# Altium PCB EasyGate1541-II.PcbDoc
Units mm, origin at the board's own origin, x right, y up, seen from the top; angles counter-clockwise.
Board outline 18.29 x 51.31 mm, 2 copper layers (Top Layer, Bottom Layer), stack 0.969 mm thick; 21 components, 55 nets, 147 pads, 63 vias.
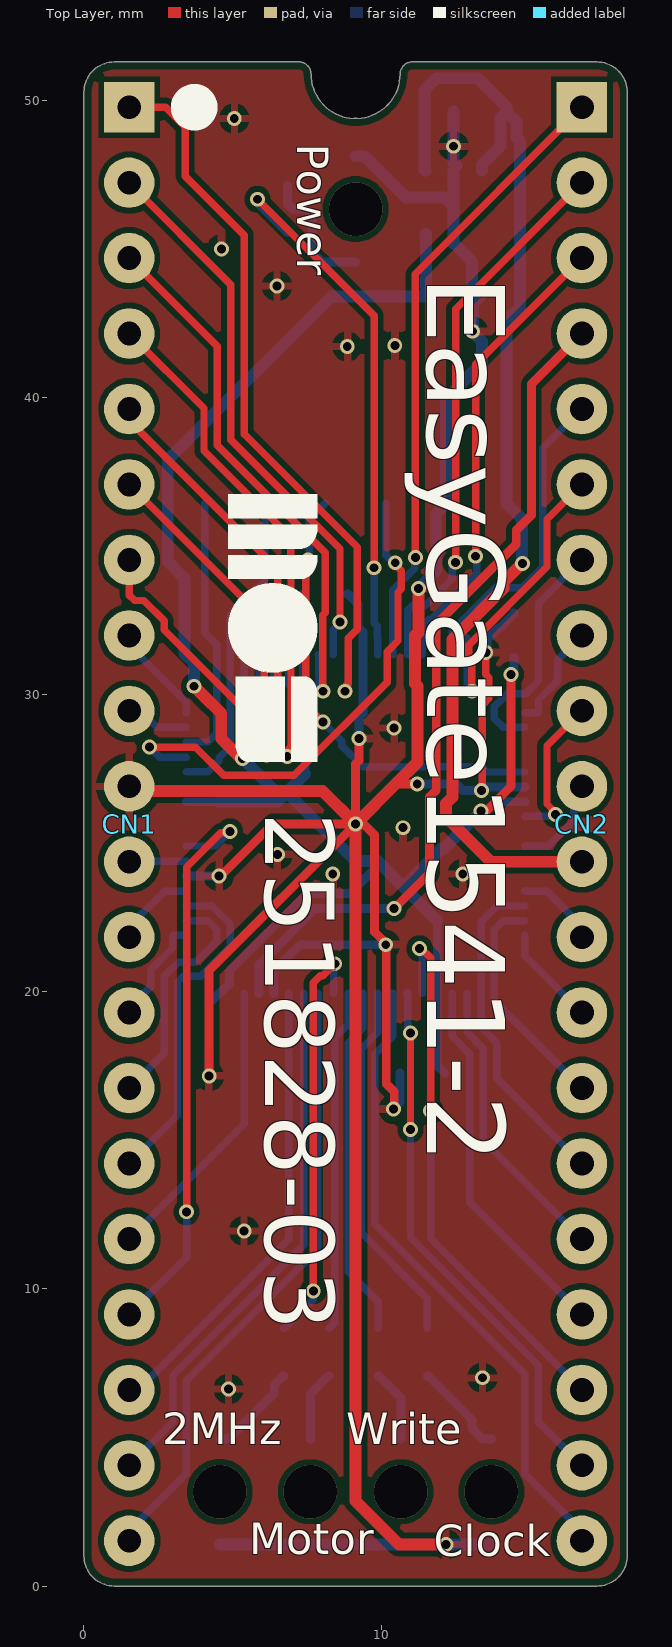
[diagram p0: Top Layer view]
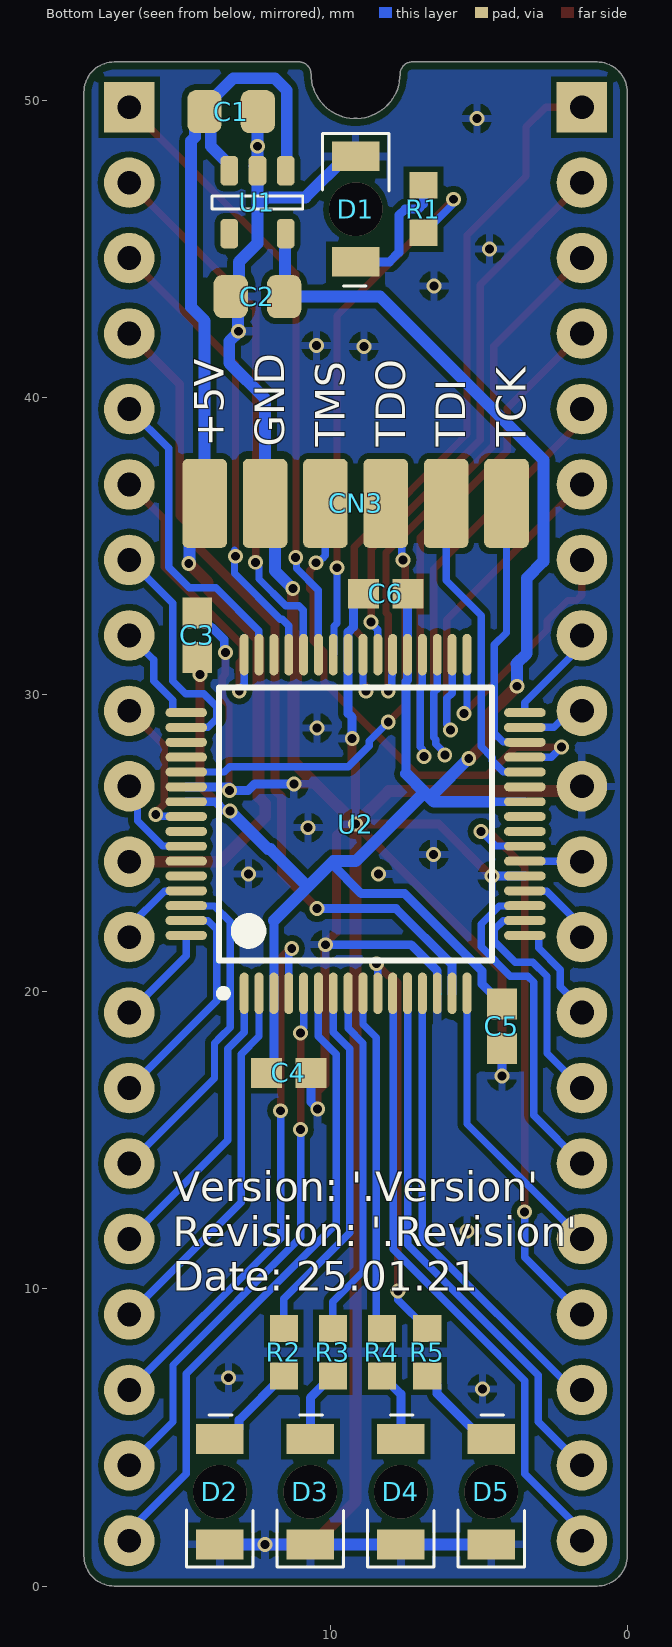
[diagram p1: Bottom Layer view, seen from below]

## Layer stack, top to bottom
Top Solder: solder mask 0.0254, SM-001, Dk 4
Top Layer: signal copper 0.035
Dielectric 1: core 0.8986, Core-043, Dk 4.3
Bottom Layer: signal copper 0.035
Bottom Solder: solder mask 0.0254, SM-001, Dk 4

## Board outline
0,1.016 ccw(c1.016,1.016) 1.016,0 17.272,0 ccw(c17.272,1.016) 18.288,1.016 18.288,50.292 ccw(c17.272,50.292) 17.272,51.308 11.049,51.308 ccw(c11.049,50.903) 10.644,50.903 cw(c9.144,50.903) 7.644,50.903 ccw(c7.239,50.903) 7.239,51.308 1.016,51.308 ccw(c1.016,50.292) 0,50.292

## Design rules (kind name [scope] priority, off if disabled: settings)
BoardOutlineClearance [All] p1: gap=0.254 ignorepadtopadclearanceinfootprint=FALSE
Clearance [All] p1: gap=0.2 ignorepadtopadclearanceinfootprint=TRUE
ComponentClearance ComponentClearance_Sheet [HasFootprint('PCB Title Block DIN A4')] p1: gap=0 collisioncheckmode=3 verticalgap=0 showdistances=FALSE
ComponentClearance [All] p2: gap=0 collisioncheckmode=3 verticalgap=0 showdistances=FALSE
MinimumSolderMaskSliver [All] p1: minsoldermaskwidth=0.103
PolygonConnect [All] p1: connectstyle=Relief reliefconductorwidth=0.254 reliefentries=4 polygonreliefangle="90 Angle" airgapwidth=0.254
RoutingVias [All] p1: holewidth=0.4 width=0.7 viastyle="Through Hole" minholewidth=0.3 minwidth=0.5 maxholewidth=0.5 maxwidth=0.8
SilkToSilkClearance [All] p1: silktosilkclearance=0
SilkToSolderMaskClearance [IsPad] p1: minsilkscreentomaskgap=0.2 clearancetoexposedcopper=TRUE
SolderMaskExpansion [All] p1: expansion=0.038 istentingtop=FALSE
UnRoutedNet [All] p1: checkbadconnections=TRUE
Width [All] p1: maxlimit=0.4 minlimit=0.25 preferedwidth=0.3
25 further rules are at their usual default settings.

## Components (designator, comment, footprint, x,y, rotation, side; value= is the part's Value field where it differs from the comment)
C1 "10µF" "Kemet C0805CxxxK8RACTU Series H=1.4mm" 13.335,49.634 r0 bottom
C2 "10µF" "Kemet C0805CxxxK8RACTU Series H=1.4mm" 12.446,43.411 r180 bottom
C3 "100nF" "CAP 100nF SMD 0603 C0603C104J3RACTU" 14.478,32.004 r270 bottom
C4 "100nF" "CAP 100nF SMD 0603 C0603C104J3RACTU" 11.394,17.272 r0 bottom
C5 "100nF" "CAP 100nF SMD 0603 C0603C104J3RACTU" 4.216,18.847 r90 bottom
C6 "100nF" "CAP 100nF SMD 0603 C0603C104J3RACTU" 8.128,33.401 r180 bottom
CN1 "Pin Header Left Side" "Pin Header 01x20 2.54mm precision Horizontal Male" 1.524,49.784 r270 top locked
CN2 "Pin Header Right Side" "Pin Header 01x20 2.54mm precision Horizontal Male" 16.764,49.784 r270 top locked
CN3 "JTAG" "SMD PAD CONN 01x06 small" 9.144,36.449 r0 bottom locked
D1 "Power" "LED green Gullwing Everlight 25-21/GHC-YSU/2A" 9.144,46.355 r270 top
D2 "Clock" "LED blue Gullwing Everlight 25-21/BHC-XR2S1/2A" 13.716,3.175 r90 top
D3 "Motor" "LED white Gullwing Everlight 25-21/T1D-ANQHY/2A" 10.668,3.175 r90 top
D4 "Writing" "LED red Gullwing Everlight 25-21SURC/S530-A4/TR8" 7.62,3.175 r90 top
D5 "2MHz" "LED white Gullwing Everlight 25-21/T1D-ANQHY/2A" 4.572,3.175 r90 top
R1 "1k" "1k Ohm R 0603 SMD" 6.858,46.355 r90 bottom
R2 "1k" "1k Ohm R 0603 SMD" 11.557,7.874 r270 bottom
R3 "1k" "1k Ohm R 0603 SMD" 9.906,7.874 r270 bottom
R4 "1k" "1k Ohm R 0603 SMD" 8.255,7.874 r270 bottom
R5 "1k" "1k Ohm R 0603 SMD" 6.731,7.874 r270 bottom
U1 "SPX5205M5-L-3-3/TR" SOT-23-5 12.446,46.586 r0 bottom
U2 "XC9572XL-10VQG64C" XC9572XL-10VQG64 9.144,25.654 r90 bottom locked

## Footprints (in the part's own frame and the unit in brackets; to place one, negate y for a bottom-side part, rotate by r counter-clockwise, add the part's x,y. Pads: shape width x height; smd on the part's side, far side on the other; paste and mask are expansions set on the pad)
"1k Ohm R 0603 SMD" [mm] "Chip Resistor 2-Leads, Body 1,60x0,80mm, IPC Medium Density"
  rect 0.9x0.95 smd: 1(-0.8,0) 2(0.8,0)
  body extent -0.8,-0.4 0.8,0.4, height 0.45
"CAP 100nF SMD 0603 C0603C104J3RACTU" [mm] "Chip Capacitor, 2-Leads, Body 1,60x0,80mm, IPC Medium Density"
  rect 1.05x1 smd: 1(-0.75,0) 2(0.75,0)
  body extent -0.8,-0.4 0.8,0.4, height 0.87
"Kemet C0805CxxxK8RACTU Series H=1.4mm" [mm]
  rrect50% 1.15x1.45 smd: 1(-0.9,0) 2(0.9,0)
  body extent -1,-0.63 1,0.63, height 1.4
"LED blue Gullwing Everlight 25-21/BHC-XR2S1/2A" [mm]
  rect 1x1.6 smd far side: 1(-1.778,0) 2(1.778,0)
  body extent -1.6,-0.8 1.6,0.8, height 0.3
"LED green Gullwing Everlight 25-21/GHC-YSU/2A" [mm]
  rect 1x1.6 smd far side: 1(-1.778,0) 2(1.778,0)
  body extent -1.6,-0.8 1.6,0.8, height 0.3
"LED red Gullwing Everlight 25-21SURC/S530-A4/TR8" [mm]
  rect 1x1.6 smd far side: 1(-1.778,0) 2(1.778,0)
  body extent -1.6,-0.8 1.6,0.8, height 0.3
"LED white Gullwing Everlight 25-21/T1D-ANQHY/2A" [mm]
  rect 1x1.6 smd far side: 1(-1.778,0) 2(1.778,0)
  body extent -1.6,-0.8 1.6,0.8, height 0.3
"Pin Header 01x20 2.54mm precision Horizontal Male" [mm] "Precision"
  rect 1.7x1.7 hole 0.8: 1(0,0)
  round 1.7 hole 0.8: 2(2.54,0) 3(5.08,0) 4(7.62,0) 5(10.16,0) 6(12.7,0) 7(15.24,0) 8(17.78,0) 9(20.32,0) 10(22.86,0) 11(25.4,0) 12(27.94,0) 13(30.48,0) 14(33.02,0) 15(35.56,0) 16(38.1,0) 17(40.64,0) 18(43.18,0) 19(45.72,0) 20(48.26,0)
  body extent -1.27,-1.27 49.53,1.27, height 1.8
"SMD PAD CONN 01x06 small" [mm]
  rrect25% 1.5x3 smd paste-2: 1(-5.08,0) 2(-3.048,0) 3(-1.016,0) 4(1.016,0) 5(3.048,0) 6(5.08,0)
SOT-23-5 [mm]
  rrect50% 0.6x1 smd: 1(-0.95,-1.06) 2(0,-1.06) 3(0.95,-1.06) 4(0.95,1.06) 5(-0.95,1.06)
  silkscreen extent -1.52,-0.2 1.52,0.23, body extent -1.45,-1.41 1.45,1.41, height 1.3
XC9572XL-10VQG64 [mm] "TSQFP, 64-Leads, Body 10,00x10,00mm, Pitch 0,50mm, IPC Medium Density"
  oval 1.4x0.3 smd: 1(-5.7,3.75) 2(-5.7,3.25) 3(-5.7,2.75) 4(-5.7,2.25) 5(-5.7,1.75) 6(-5.7,1.25) 7(-5.7,0.75) 8(-5.7,0.25) 9(-5.7,-0.25) 10(-5.7,-0.75) 11(-5.7,-1.25) 12(-5.7,-1.75) 13(-5.7,-2.25) 14(-5.7,-2.75) 15(-5.7,-3.25) 16(-5.7,-3.75) 33(5.7,-3.75) 34(5.7,-3.25) 35(5.7,-2.75) 36(5.7,-2.25) 37(5.7,-1.75) 38(5.7,-1.25) 39(5.7,-0.75) 40(5.7,-0.25) 41(5.7,0.25) 42(5.7,0.75) 43(5.7,1.25) 44(5.7,1.75) 45(5.7,2.25) 46(5.7,2.75) 47(5.7,3.25) 48(5.7,3.75)
  oval 0.3x1.4 smd: 17(-3.75,-5.7) 18(-3.25,-5.7) 19(-2.75,-5.7) 20(-2.25,-5.7) 21(-1.75,-5.7) 22(-1.25,-5.7) 23(-0.75,-5.7) 24(-0.25,-5.7) 25(0.25,-5.7) 26(0.75,-5.7) 27(1.25,-5.7) 28(1.75,-5.7) 29(2.25,-5.7) 30(2.75,-5.7) 31(3.25,-5.7) 32(3.75,-5.7) 49(3.75,5.7) 50(3.25,5.7) 51(2.75,5.7) 52(2.25,5.7) 53(1.75,5.7) 54(1.25,5.7) 55(0.75,5.7) 56(0.25,5.7) 57(-0.25,5.7) 58(-0.75,5.7) 59(-1.25,5.7) 60(-1.75,5.7) 61(-2.25,5.7) 62(-2.75,5.7) 63(-3.25,5.7) 64(-3.75,5.7)
  silkscreen extent -5.82,-4.6 4.6,4.6, body extent -6.01,-6.01 6.01,6.01, height 1.1

## Part data
C1 C2: library part CMP-Capacitors-Ceramic_Capacitors-00016-2, "KEMET - C0805C106K8RACTU - CAP, 10µF, 10V, 10%, X7R, 0805", Capacitance=10uF, Case Code (Imperial)=0805, Case Code (Metric)=2012, Dielectric=X7R, Dielectric Material=Ceramic, Max Operating Temperature=125°C, Min Operating Temperature=-55°C, Package Quantity=1, Tolerance=10%, Voltage=10V, Case/Package=0805, Depth=1.25mm, Dissipation Factor=7.5%, Height=1.25mm, Length=2mm, Mount="Surface Mount,PCB", Packaging="Tape and Reel", REACH SVHC="No SVHC", Termination=SMD/SMT, Thickness=0.055inch, Voltage Rating=10V, Voltage Rating (DC)=10V, Width=1.2mm
C3 C4 C5 C6: library part CMP-Capacitors-Ceramic_Capacitors-00012-1, "KEMET         C0603C104J3RACTU             SMD Multilayer Ceramic Capacitor, 0603 [1608 Metric], 0.1 F, 25 V,  5%, X7R, C Series", Case Code (Imperial)=0603, Case Code (Metric)=1608, Dielectric=X7R, Dielectric Material=Ceramic, Max Operating Temperature=125°C, Min Operating Temperature=-55°C, Package Quantity=4000, Tolerance=5%, Voltage=25V, Capacitance=100nF, Case/Package=0603, Contact Plating=Tin,Matte, Depth=0.8mm, Height=0.8mm, Lead Pitch=0.7mm, Length=1.6mm, Mount="Surface Mount,PCB", Number of Pins=2, Packaging="Tape and Reel", Radiation Hardening=No, REACH SVHC="No SVHC", Termination=SMD/SMT, Thickness=0.034inch, Voltage Rating=25V, Voltage Rating (DC)=25V, Width=0.031inch
CN1 CN2: library part CMP-Connectors-Male_PIN_Headers-00031-2, "Conn Header Vert 20POS 2MM", Color=Black, Package Quantity=250, Connector Type="Male Pin", Contact Mating Length=0.141inch, Contact Plating=Gold, Mount="Through Hole", Number of Positions=20, Number of Rows=1, Packaging=Bulk, Pitch=0.079inch, Termination=Solder
CN3: library part CMP-Connectors-00022-1, "SMD Pad Connector 01x06"
D1: library part CMP-LEDs-00010-1, "LED Uni-Color Green 518nm 2-Pin Chip LED T/R", Color=Green, Forward Current=20mA, Forward Voltage=3.5V, Dominant Wavelength=525nm, Lens Style=Diffused,Colorless,Circular, Mount="Surface Mount", Number of LEDs=1, Number of Pins=2, Packaging="Tape and Reel", Radiation Hardening=No, Viewing Angle=60°
D2: library part CMP-LEDs-00012-1, "LED Uni-Color Blue 468nm Chip LED 2-Pin SMD T/R", Forward Current=20mA
D3 D5: library part CMP-LEDs-00011-1, "Standard LEDs - SMD SMD LED", Case/Package=SMD/SMT, Color=White, Forward Current=25mA, Forward Voltage=2.92V, Lens Color=Yellow, Max Operating Temperature=85°C, Min Operating Temperature=-40°C, Package Quantity=2000, Power Dissipation=95mW, Reverse Voltage=5V, Test Current=5mA, Depth=1.6mm, Height=1.1mm, Length=3.2mm, Lens Style=Diffused,Colored,Circular, Lens Transparency=Diffused, Luminous Intensity=70mcd, Mount="Surface Mount", Number of Elements=1, Number of LEDs=1, Number of Pins=2, Packaging="Tape and Reel", Radiation Hardening=No, Viewing Angle=130°, Width=1.6mm
D4: library part CMP-LEDs-00009-3, "SMD LED red 2.7. . .3.15 V Bottom View, 25-21SURC/S530-A4/TR8, Everlight Electronics", Forward Current=20mA
R1 R2 R3 R4 R5: library part CMP-Resistors-Yageo_SMD_060300002-1, "RES SMD 1K OHM 1% 1/10W 0603", Case Code (Imperial)=0603, Case Code (Metric)=1608, Max Operating Temperature=155°C, Min Operating Temperature=-55°C, Power Rating=100mW, Resistance=1kR, Temperature Coefficient=100ppm/°C, Tolerance=1%, Voltage Rating=50V, Case/Package=0603, Composition="Thick Film", Contact Plating=Tin,Matte, Depth=0.8mm, Height=0.45mm, Lead Free="Lead Free", Length=1.6mm, Military Standard=Not, Packaging="Tape and Reel", Radiation Hardening=No, REACH SVHC="No SVHC", Termination=SMD/SMT
U1: library part CMP-ICs-Power_Supply-00002-2, "LDO Regulator Pos 3.3V 0.15A 5-Pin SOT-23 T/R", Case/Package=SOT-23, Dropout Voltage=210mV, Max Input Voltage=16V, Max Operating Temperature=125°C, Max Output Current=150mA, Min Input Voltage=2.5V, Min Operating Temperature=-40°C, Min Output Voltage=3.3V, Quiescent Current=1uA, Accuracy=1%, Height=1.15mm, Lead Free="Lead Free", Length=2.9mm, Mount="Surface Mount", Number of Outputs=1, Number of Pins=5, Number of Regulators=1, Output Current=150mA, Output Type=Fixed, Output Voltage=3.3V, Packaging="Tape and Reel", Polarity=Positive, Radiation Hardening=No, Width=1.6mm
U2: library part CMP-ICs-CPLD_FPGA-00004-1, "IC CPLD 72MC 10NS 64VQFP", Case/Package=TQFP, Max Frequency=100MHz, Max Operating Temperature=70°C, Max Supply Voltage=3.6V, Min Operating Temperature=0°C, Min Supply Voltage=3V, Operating Supply Voltage=3.3V, Package Quantity=160, Contact Plating=Tin,Matte, Lead Free="Lead Free", Memory Type=FLASH, Mount="Surface Mount", Number of Gates=1600, Number of I/Os=52, Number of Logic Blocks (LABs)=4, Number of Logic Elements/Cells=4, Number of Macrocells=72, Number of Pins=64, Packaging=Tray, Propagation Delay=10ns, Radiation Hardening=No, Speed Grade=10, Turn-On Delay Time=10ns

## Via types
v1: diameter 0.5, hole 0.3, Top Layer to Bottom Layer, tented both sides, 58 vias
v2: diameter 1.8, hole 1.8, Top Layer to Bottom Layer, 5 vias

## Nets (pads, with @x,y where several pads share a name; then routed paths per layer and width w, separated by ;. In a path a pad name is that pad's centre, name@x,y a point inside that pad or via, vN(x,y) a via of type N, cw(c..) or ccw(c..) an arc to the next point about the centre after c; other vN are vias at no path point)
2MHz: R5.1 U2.10 | length 14.1
  Top Layer w0.25: v1(7.722,9.931) 7.722,20.308 7.961,20.548 8.043,20.548 v1(8.445,20.949)
  Bottom Layer w0.25: R5.1 6.756,8.674 7.722,9.64 v1(7.722,9.931) ; U2.10 8.404,19.964 8.404,20.908 v1(8.445,20.949)
+3V3: C2.2 C3.2 C4.2 C5.2 C6.2 U1.5 U2.3 U2.26 U2.37 U2.55 | length 67.8
  Top Layer w0.3: v1(13.367,26.086) 13.406,26.124 13.576,26.124 14.376,26.924 v1(14.376,30.683)
  Top Layer w0.4: v1(3.709,30.291) 4.021,29.98 4.624,29.377 4.624,28.524 5.265,27.883 5.315,27.883 v1(5.334,27.864)
  Bottom Layer w0.3: U2.26 4.547,26.404 ; C5.2 4.216,19.622 4.566,19.972 4.591,19.972 4.894,20.274 4.894,20.711 7.492,23.309 8.952,23.309 9.97,24.328 ; C6.2 7.394,33.385 U2.37 7.394,30.505 7.444,30.455 7.444,27.344 ; 11.894,22.404 U2.3 11.894,17.522 C4.2 ; v1(13.367,26.086) 13.406,26.124 13.576,26.124 13.856,26.404 U2.55 ; v1(14.376,30.683) 14.478,30.785 C3.2
  Bottom Layer w0.4: v1(3.709,30.291) 3.709,31.022 3.73,31.043 3.382,31.391 3.382,33.931 2.819,34.493 2.819,37.91 8.32,43.411 C2.2 11.521,43.436 11.521,45.501 U1.5 ; 4.547,26.404 6.504,26.404 ; v1(5.334,27.864) 6.504,26.694 6.504,26.404 ; 7.444,27.344 6.824,26.724 ; 11.894,22.404 10.752,23.546 ; v1(13.367,26.086) 12.087,24.806 12.013,24.806 10.752,23.546 ; 6.504,26.404 6.824,26.724 ; 6.824,26.724 9.145,24.404 9.894,24.404 10.752,23.546
+5V: C1.2 CN2.11 CN3.6 U1.1 U1.3 | length 39.2
  Top Layer w0.4: v1(14.76,34.428) 14.121,33.79 14.121,33.582 12.41,31.871 12.41,26.567 12.183,26.341 12.183,25.891 13.691,24.384 CN2.11
  Bottom Layer w0.4: U1.1 11.46,47.682 11.46,50.356 11.863,50.759 13.26,50.759 14.235,49.784 C1.2 ; U1.3 13.396,47.846 14.019,48.469 14.019,49.418 C1.2 ; v1(14.76,34.428) 14.741,34.448 14.741,35.932 CN3.6 14.224,42.592 14.681,43.049 14.681,48.647 14.556,48.772 14.556,49.313 C1.2
A\: CN1.14 U2.18 | length 8.1
  Bottom Layer w0.25: CN1.14 2.699,17.939 2.699,20.523 3.182,21.006 3.768,21.006 4.469,21.707 4.469,22.101 4.175,22.394 3.454,22.394 U2.18
A\C\C\L\: CN1.20 U2.11 | length 21.1
  Bottom Layer w0.25: CN1.20 1.524,1.859 3.447,3.782 3.447,6.913 7.869,11.335 7.869,19.344 7.884,19.359 7.884,19.944 U2.11
ATN: CN2.17 U2.2 | length 12.6
  Bottom Layer w0.25: U2.2 12.394,18.507 12.994,17.907 12.994,12.914 CN2.17
ATNA: CN2.19 U2.5 | length 18.3
  Top Layer w0.25: v1(10.994,15.367) v1(10.994,18.622)
  Bottom Layer w0.25: U2.5 10.894,18.79 10.994,18.69 v1(10.994,18.622) ; v1(10.994,15.367) 10.994,11.738 15.291,7.441 15.291,5.537 CN2.19
ATNI: CN2.18 U2.4 | length 18.7
  Top Layer w0.25: v1(11.294,21.463) 11.362,21.463 11.668,21.156 v1(11.669,16.002)
  Bottom Layer w0.25: v1(11.294,21.463) 11.294,21.395 11.394,21.295 U2.4 ; v1(11.669,16.002) 11.669,11.699 CN2.18
B: CN2.3 U2.45 | length 15.9
  Top Layer w0.25: v1(13.186,34.668) 13.186,41.126 CN2.3
  Bottom Layer w0.25: U2.45 11.394,32.329 11.617,32.552 11.682,32.552 13.22,34.09 v1@13.22,34.701 ; v1(13.186,34.668) v1@13.22,34.701 ; v1@13.22,34.877 v1@13.22,34.701
BR: CN2.1 U2.43 | length 21.1
  Top Layer w0.25: v1(11.159,34.622) 11.151,34.631 11.151,44.171 CN2.1
  Bottom Layer w0.25: U2.43 10.394,33.527 11.132,34.266 11.132,34.595 v1(11.159,34.622)
Clock: R2.1 U2.7 | length 12.4
  Bottom Layer w0.25: U2.7 9.894,18.643 9.344,18.093 9.344,11.89 11.557,9.677 R2.1
CLR: CN2.10 U2.58 | length 3.3
  Bottom Layer w0.25: U2.58 14.854,24.914 15.632,24.914 16.487,25.768 16.487,26.647 CN2.10
DS0: CN1.15 U2.19 | length 11.5
  Bottom Layer w0.25: CN1.15 3.149,15.849 3.149,20.336 3.348,20.535 3.933,20.535 4.919,21.521 4.919,22.287 4.312,22.894 3.454,22.894 U2.19
DS1: CN1.16 U2.16 | length 9.9
  Bottom Layer w0.25: CN1.16 5.394,15.554 U2.16
GND: C1.1 C2.1 C3.1 C4.1 C5.1 C6.1 CN1.10 CN3.5 D1.1 D2.1 D3.1 D4.1 D5.1 U1.2 U2.14 U2.21 U2.41 U2.54 | length 127.5
  Top Layer w0.25: v1(13.389,26.786) 13.406,26.802 13.406,29.657 13.635,29.886 13.635,30.582 13.528,30.689 v1(13.528,31.433)
  Top Layer w0.3: v1(4.216,17.17) 4.216,20.726 v1(9.144,25.654) ; v1(4.547,23.901) 4.597,23.901 6.35,25.654 v1(9.144,25.654) ; v1(9.258,28.528) 9.258,27.792 9.144,27.678 v1(9.144,25.654) ; v1(10.419,16.058) 10.447,16.086 10.447,16.638 10.177,16.908 10.177,21.573 v1(10.16,21.59) 10.16,21.644 9.786,22.018 9.786,25.28 9.45,25.616 9.182,25.616 v1(9.144,25.654) ; 10.494,27.004 v1(11.22,27.004)
  Top Layer w0.4: CN1.10 1.684,26.764 8.034,26.764 v1(9.144,25.654) ; v1(11.257,33.577) 11.257,32.101 11.151,31.994 11.151,30.375 11.232,30.294 11.232,27.742 10.494,27.004 v1(9.144,25.654) ; v1(12.192,1.397) 10.608,1.397 9.144,2.861 v1(9.144,25.654)
  Bottom Layer w0.3: U2.21 4.544,23.904 v1(4.547,23.901) ; v1(4.216,17.17) C5.1 ; U2.14 6.394,20.711 7.273,21.59 v1(10.16,21.59) ; C6.1 9.219,33.06 9.219,32.286 9.394,32.111 9.394,31.904 9.394,29.378 9.258,29.242 v1(9.258,28.528) ; v1(10.419,16.058) 10.419,16.062 10.644,16.287 C4.1 ; v1(11.22,27.004) 12.539,27.004 12.757,26.786 v1(13.389,26.786) ; v1@13.389,26.904 U2.54 ; v1(13.528,31.433) 13.566,31.472 13.566,31.862 13.964,32.26 14.009,32.26 14.478,32.729 C3.1
  Bottom Layer w0.4: D5.1 D4.1 D3.1 v1(12.192,1.397) D2.1 ; D1.1 9.444,48.133 10.831,46.746 12.122,46.746 12.446,46.422 ; v1(11.257,33.577) 11.86,34.18 11.86,36.117 CN3.5 12.192,39.969 13.396,41.173 13.396,41.905 13.085,42.216 v1(13.085,42.243) ; C1.1 12.44,49.629 12.44,47.907 U1.2@12.546,47.802 ; U1.2 12.446,46.422 ; v1@13.052,42.21 13.104,42.262 13.104,43.169 C2.1 13.068,43.689 13.068,44.576 12.446,45.198 12.446,46.422
  other v1: 4.872,6.635 13.416,7.011 5.394,11.958 8.377,23.976 12.751,23.976 6.519,24.624 10.743,25.53 10.441,28.883 8.865,41.732 10.465,41.758 6.502,43.764 4.633,45.012 12.44,48.469 5.061,49.403
LOCK: CN2.8 U2.49 | length 3.6
  Bottom Layer w0.25: U2.49 15.278,29.404 15.301,29.427 15.301,29.829 15.945,30.473 15.945,31.185 CN2.8
Motor: R3.1 U2.8 | length 11.9
  Bottom Layer w0.25: U2.8 9.394,18.779 8.894,18.279 8.894,10.588 9.906,9.576 R3.1
MTR: CN1.13 U2.17 | length 3.7
  Bottom Layer w0.25: CN1.13 1.524,19.445 2.249,20.17 2.249,20.745 2.983,21.479 2.983,21.881 3.006,21.904 U2.17
NetD1_2: D1.2 R1.2 | length 4.5
  Bottom Layer w0.3: R1.2 6.858,46.531 7.034,46.355 7.478,46.355 7.683,46.15 7.683,44.895 8.001,44.577 D1.2
NetD2_2: D2.2 R2.2 | length 3.2
  Bottom Layer w0.3: R2.2 11.582,7.074 13.066,5.59 13.066,5.303 13.416,4.953 D2.2
NetD3_2: D3.2 R3.2 | length 2.5
  Bottom Layer w0.3: R3.2 9.931,7.074 10.668,6.337 D3.2
NetD4_2: D4.2 R4.2 | length 2.4
  Bottom Layer w0.3: D4.2 7.62,6.464 8.23,7.074 R4.2
NetD5_2: D5.2 R5.2 | length 3.2
  Bottom Layer w0.3: D5.2 4.872,4.953 6.406,6.487 6.406,6.774 6.706,7.074 R5.2
OE: CN1.19 U2.12 | length 18.3
  Bottom Layer w0.25: CN1.19 2.997,5.537 2.997,7.099 7.394,11.496 U2.12
OSC: CN2.20 U2.6 | length 21.6
  Bottom Layer w0.25: U2.6 10.394,18.507 9.794,17.907 9.794,17.27 9.794,12.195 14.841,7.148 14.841,3.782 16.764,1.859 CN2.20
PHI0: CN2.4 U2.15 | length 28.3
  Top Layer w0.3: v1(10.439,22.809) 11.633,24.003 11.633,26.568 11.86,26.795 11.86,32.377 14.554,35.071 14.554,35.546 15.062,36.054 15.062,40.462 CN2.4
  Bottom Layer w0.3: U2.15 5.894,20.918 7.785,22.809 v1(10.439,22.809)
PLL: CN2.9 U2.56 | length 5.1
  Top Layer w0.25: v1(15.871,25.98) 15.871,26.047 15.589,26.329 15.589,28.289 CN2.9
  Bottom Layer w0.25: U2.56 14.854,25.914 15.737,25.914 15.803,25.98 v1(15.871,25.98)
Power: R1.1 U2.42 | length 18.6
  Top Layer w0.25: v1(5.842,46.685) 9.769,42.758 v1(9.769,34.28)
  Bottom Layer w0.25: v1(5.842,46.685) 5.89,46.637 5.89,46.498 6.833,45.555 R1.1 ; v1(9.769,34.28) 9.769,32.408 9.869,32.308 9.869,31.964 9.884,31.949 9.884,31.364 U2.42
Q: CN2.6 U2.48 | length 10.4
  Top Layer w0.25: v1(13.06,30.124) 13.06,31.088 12.953,31.195 12.953,31.672 15.589,34.308 15.589,35.909 CN2.6
  Bottom Layer w0.25: U2.48@12.894,31.918 U2.48 12.894,30.358 13.06,30.192 v1(13.06,30.124)
R/W\: CN2.7 U2.50 | length 8.1
  Bottom Layer w0.25: U2.50 14.834,28.914 14.113,28.914 13.819,29.207 13.819,29.601 14.252,30.034 14.87,30.034 15.303,30.467 15.303,33.083 CN2.7
S\Y\N\C\: CN1.17 U2.23 | length 19.5
  Top Layer w0.25: v1(3.454,12.598) 3.454,24.206 4.604,25.356 4.871,25.356 v1(4.919,25.404)
  Bottom Layer w0.25: CN1.17 3.454,11.074 v1(3.454,12.598) ; U2.23 3.454,24.914 4.429,24.914 v1(4.919,25.404)
SOE: CN2.2 U2.44 | length 18.6
  Top Layer w0.25: v1(12.51,34.464) 12.51,42.99 CN2.2
  Bottom Layer w0.25: U2.44 10.904,31.364 10.904,32.856 11.05,33.002 11.495,33.002 12.394,33.901 12.394,34.304 12.51,34.42 v1(12.51,34.464)
STEP0: CN1.12 U2.20 | length 2.8
  Bottom Layer w0.25: CN1.12 1.524,22.206 2.713,23.394 3.434,23.394 U2.20
STEP1: CN1.11 U2.22 | length 1.9
  Bottom Layer w0.25: CN1.11 1.534,24.394 3.434,24.394 U2.22
TCK: CN3.1 U2.30 | length 9.1
  Bottom Layer w0.25: U2.30 3.454,28.414 4.175,28.414 4.469,28.707 4.469,31.691 4.064,32.096 CN3.1
TDI: CN3.2 U2.28 | length 10.6
  Bottom Layer w0.25: U2.28 3.454,27.414 4.175,27.414 4.547,27.785 4.547,27.89 4.919,28.262 4.919,32.673 6.096,33.85 CN3.2
TDO: CN3.3 U2.53 | length 15.5
  Top Layer w0.25: v1(7.544,34.544) 7.469,34.469 7.469,29.662 v1(8.044,29.087)
  Bottom Layer w0.25: v1(7.544,34.544) 7.592,34.592 7.592,35.913 CN3.3 ; v1(8.044,29.087) 8.683,28.447 8.683,28.29 9.394,27.579 13.385,27.579 13.56,27.404 U2.53
TED: CN1.18 U2.13 | length 15.7
  Bottom Layer w0.25: CN1.18 1.823,6.604 6.894,11.675 U2.13
TEST: CN1.1 U2.40 | length 25
  Top Layer w0.25: CN1.1 2.748,49.784 3.406,49.126 3.406,47.467 5.392,45.48 5.392,38.782 9.194,34.98 9.194,32.213 8.894,31.913 8.894,30.396 8.842,30.344 8.842,30.172 v1(8.794,30.124)
  Bottom Layer w0.25: v1(8.794,30.124) 8.794,30.192 8.894,30.292 U2.40
TMS: CN3.4 U2.29 | length 17.5
  Top Layer w0.25: v1(2.21,28.245) 3.752,28.245 4.708,27.289 7.07,27.289 10.207,30.425 10.207,31.452 10.573,31.819 10.573,33.459 10.682,33.568 10.682,34.181 10.481,34.382 v1(10.481,34.45)
  Bottom Layer w0.25: v1(2.21,28.245) 2.551,27.904 U2.29 ; CN3.4 10.16,34.702 10.238,34.624 10.239,34.624 10.413,34.45 v1(10.481,34.45)
Writing: R4.1 U2.9 | length 11.5
  Bottom Layer w0.25: R4.1 8.444,8.863 8.444,18.466 8.894,18.916 U2.9
X\Q\: CN2.5 U2.47 | length 10.6
  Bottom Layer w0.25: U2.47 12.404,31.364 12.404,32.164 13.843,33.604 14.749,33.604 15.439,34.294 15.439,38.299 CN2.5
X\R\W\: CN2.12 U2.61 | length 2.8
  Bottom Layer w0.25: U2.61 14.854,23.394 15.575,23.394 16.764,22.206 CN2.12
Y0: CN2.16 U2.1 | length 9.9
  Bottom Layer w0.25: U2.1 12.894,18.643 13.444,18.093 13.444,15.004 CN2.16
Y1: CN2.15 U2.62 | length 11.2
  Bottom Layer w0.25: U2.62 14.834,22.894 13.906,22.894 13.369,22.358 13.369,19.252 13.369,18.804 13.685,18.488 13.894,18.279 13.894,17.094 CN2.15
Y2: CN2.14 U2.63 | length 7.7
  Bottom Layer w0.25: U2.63 14.834,22.394 14.113,22.394 13.819,22.101 13.819,19.709 CN2.14
Y3: CN2.13 U2.64 | length 3.4
  Bottom Layer w0.25: U2.64 14.844,21.224 CN2.13
YB0: CN1.2 U2.39 | length 18.9
  Top Layer w0.25: CN1.2 1.524,47.232 4.942,43.814 4.942,38.595 8.619,34.918 v1(8.619,32.451)
  Bottom Layer w0.25: U2.39 8.394,32.189 8.619,32.414 v1(8.619,32.451)
YB1: CN1.3 U2.38 | length 18.6
  Top Layer w0.25: CN1.3 4.492,41.736 4.492,38.409 8.119,34.782 8.119,32.764 8.044,32.689 v1(8.044,30.124)
  Bottom Layer w0.25: U2.38 7.904,31.344 7.904,30.668 7.919,30.652 7.919,30.249 v1(8.044,30.124)
YB2: CN1.4 U2.36 | length 20.1
  Top Layer w0.25: CN1.4 4.042,39.646 4.042,38.218 6.969,35.291 6.969,34.306 6.969,28.253 6.892,28.176 6.892,27.976 v1(6.844,27.929)
  Bottom Layer w0.25: v1(6.844,27.929) 6.892,27.976 6.892,28.176 6.969,28.253 6.969,30.259 6.894,30.334 U2.36
YB3: CN1.5 U2.35 | length 17.5
  Top Layer w0.25: CN1.5 1.524,39.232 6.519,34.237 6.519,28.577 6.442,28.5 6.442,28.346 6.14,28.045 v1(6.14,27.977)
  Bottom Layer w0.25: v1(6.14,27.977) 6.14,28.045 6.442,28.346 6.442,28.5 6.519,28.577 6.519,30.072 6.394,30.197 U2.35
YB4: CN1.6 U2.34 | length 12.9
  Top Layer w0.25: CN1.6 6.069,32.539 6.069,29.008 5.944,28.883 v1(5.944,28.815)
  Bottom Layer w0.25: U2.34 5.894,30.061 6.069,29.886 6.069,29.008 5.944,28.883 v1(5.944,28.815)
YB5: CN1.7 U2.33 | length 9
  Top Layer w0.25: CN1.7 1.524,33.36 1.705,33.179 2.011,33.179 2.699,32.491 2.699,32.185 5.494,29.39 v1(5.494,29.38)
  Bottom Layer w0.25: U2.33 5.394,29.547 5.494,29.447 v1(5.494,29.38)
YB6: CN1.8 U2.32 | length 3.4
  Bottom Layer w0.25: CN1.8 1.524,31.663 3.444,29.743 U2.32
YB7: CN1.9 U2.31 | length 2.2
  Bottom Layer w0.25: CN1.9 1.909,29.464 2.469,28.904 U2.31
pads on no net: U1.4 U2.24 U2.25 U2.27 U2.46 U2.51 U2.52 U2.57 U2.59 U2.60
copper on no net:
  other v2: 4.572,3.175 7.62,3.175 10.668,3.175 13.716,3.175 9.144,46.355

## Polygon pours and split planes (outlines as drawn)
GND on Top Layer "Top Layer - GND" (solid, remove dead copper, pour order 0): 0,1.016 ccw(c1.016,1.016) 1.016,0 17.272,0 ccw(c17.272,1.016) 18.288,1.016 18.288,50.292 ccw(c17.272,50.292) 17.272,51.308 11.049,51.308 ccw(c11.049,50.903) 10.644,50.903 cw(c9.144,50.903) 7.644,50.903 ccw(c7.239,50.903) 7.239,51.308 1.016,51.308 ccw(c1.016,50.292) 0,50.292
GND on Bottom Layer "Bottom Layer - GND" (solid, pour order 1): 0,1.016 ccw(c1.016,1.016) 1.016,0 17.272,0 ccw(c17.272,1.016) 18.288,1.016 18.288,50.292 ccw(c17.272,50.292) 17.272,51.308 11.049,51.308 ccw(c11.049,50.903) 10.644,50.903 cw(c9.144,50.903) 7.644,50.903 ccw(c7.239,50.903) 7.239,51.308 1.016,51.308 ccw(c1.016,50.292) 0,50.292

## Silkscreen, mask and mechanical layers (free items; w line width, h text height)
Top Overlay:
  drawing of 8 lines, arcs and shapes, not listed
  text "Power" at 6.831,48.561 h1.8 r270
  text "EasyGate1541-2" at 10.703,44.103 h4.5 r270
  text "251828-03" at 5.321,26.043 h4 r270
  text "2MHz" at 2.634,4.418 h1.8
  text "Write" at 8.827,4.418 h1.8
  text "Motor" at 5.557,0.71 h1.8
  text "Clock" at 11.782,0.649 h1.8
Bottom Overlay:
  text "TCK" at 3.414,38.354 h1 r270
  text "TDI" at 5.446,38.354 h1 r270
  text "TDO" at 7.478,38.354 h1 r270
  text "TMS" at 9.51,38.354 h1 r270
  text "GND" at 11.542,38.354 h1 r270
  text "+5V" at 13.574,38.354 h1 r270
  text "Version: '.Version' / Revision: '.Revision' / Date: 25.01.21" at 15.291,9.947 h1
Board:
  lines w0.1: 1.016,51.308 ccw(c1.016,51.308) 1.016,51.308 ; 1.016,51.308 ccw(c1.016,51.308) 1.016,51.308 ; 1.016,51.308 ccw(c1.016,50.292) 0,50.292 0,1.016 ccw(c1.016,1.016) 1.016,0 17.272,0 ccw(c17.272,1.016) 18.288,1.016 18.288,50.292 ccw(c17.272,50.292) 17.272,51.308 ; 1.016,51.308 7.239,51.308 cw(c7.239,50.903) 7.644,50.903 ccw(c9.144,50.903) 10.644,50.903 cw(c11.049,50.903) 11.049,51.308 17.272,51.308 ; 17.272,51.308 ccw(c17.272,51.308) 17.272,51.308 ; 17.272,51.308 ccw(c17.272,51.308) 17.272,51.308